# Altium PCB tm4c123_dev_board.PcbDoc
Units mil, origin at the board's own origin, x right, y up, seen from the top; angles counter-clockwise.
Board outline 6000 x 4000 mil, 2 copper layers (Top Layer, Bottom Layer); 27 components, 57 nets, 189 pads, 38 vias.
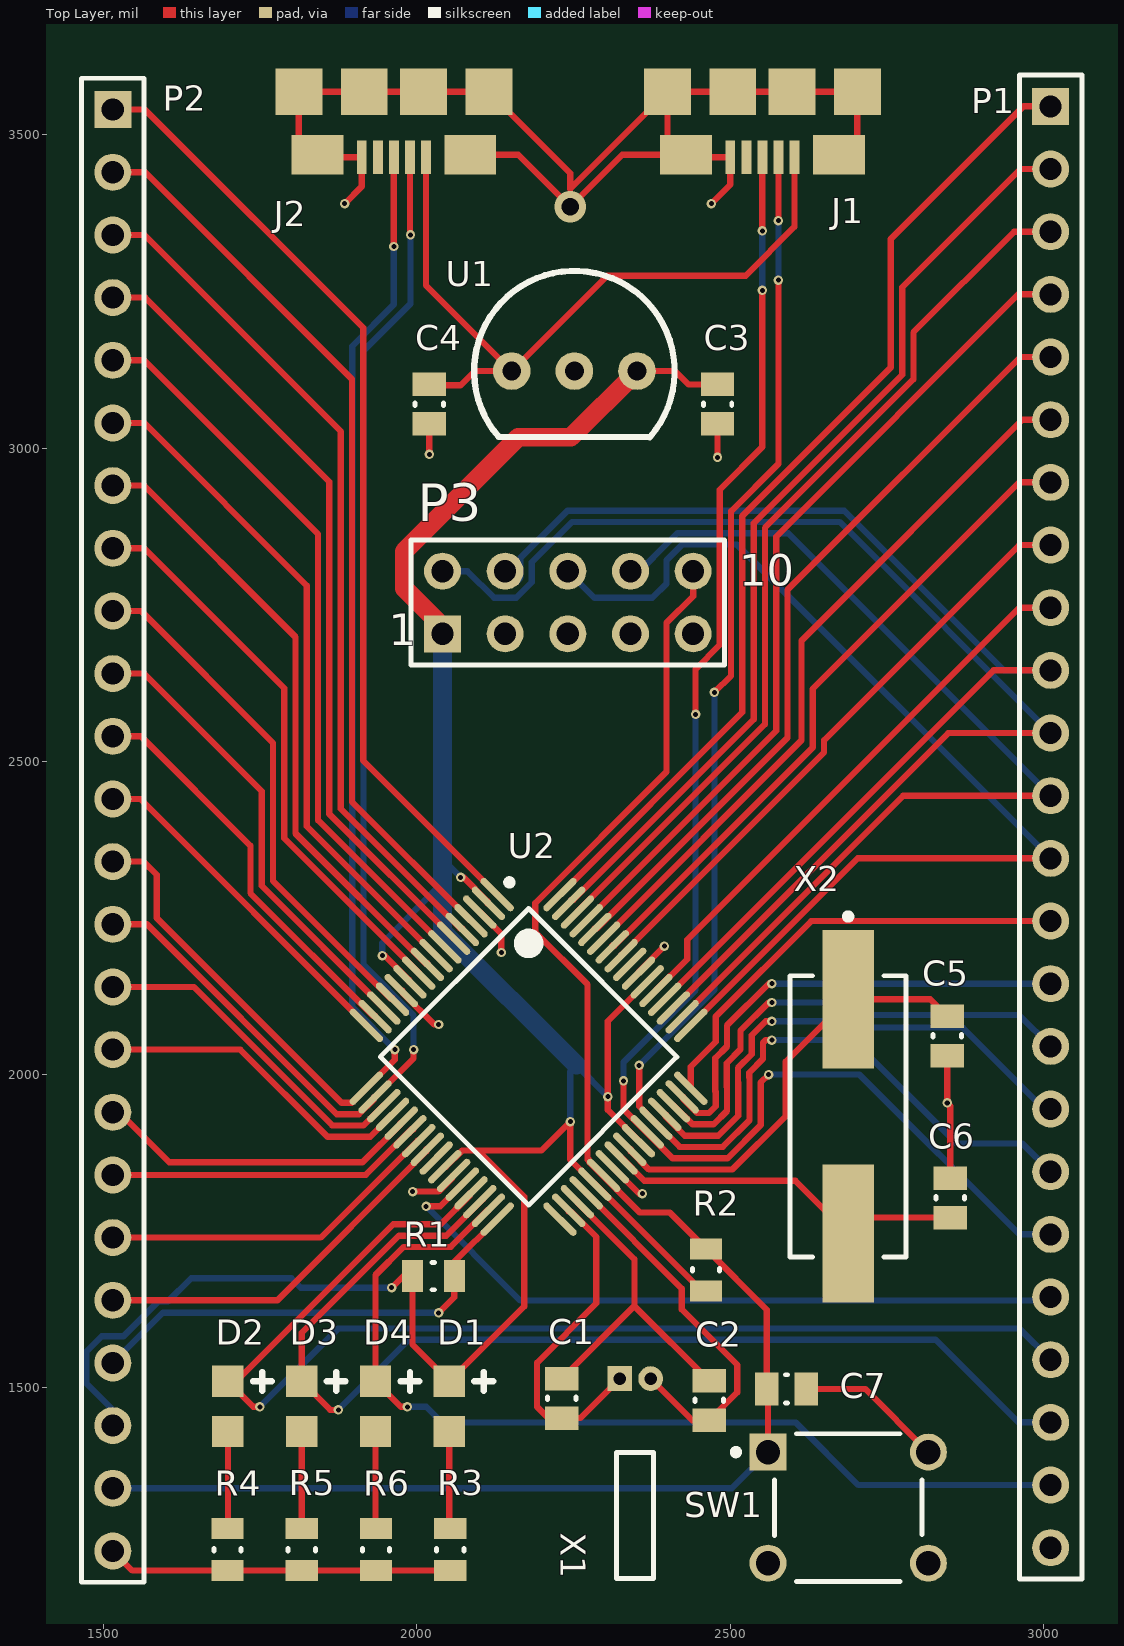
[diagram p0: Top Layer view]
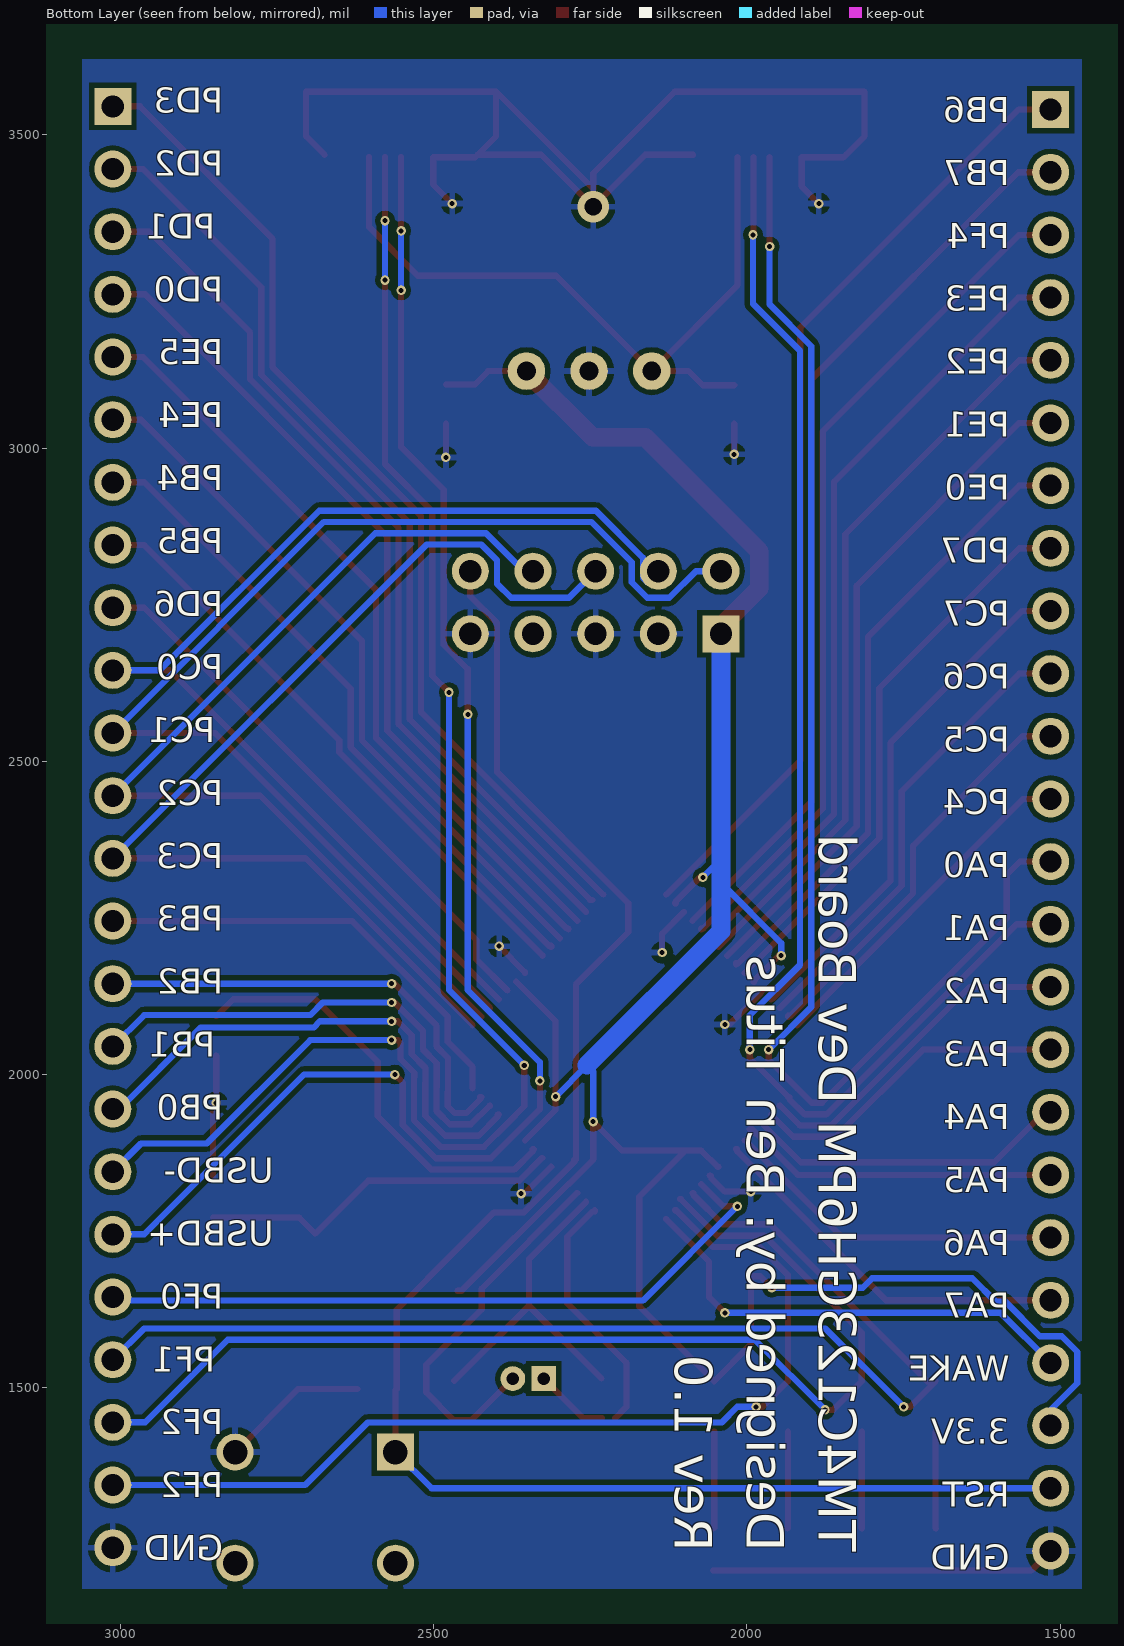
[diagram p1: Bottom Layer view, seen from below]

## Layer stack, top to bottom
Top Solder: solder mask 0.4, Solder Resist, Dk 3.5
Top Layer: signal copper 1.4
Dielectric 1: dielectric 12.6, FR-4, Dk 4.8
Bottom Layer: signal copper 1.4
Bottom Solder: solder mask 0.4, Solder Resist, Dk 3.5

## Board outline
1000,1000 7000,1000 7000,5000 1000,5000

## Design rules (kind name [scope] priority, off if disabled: settings)
Clearance [All] p1: gap=8 ignorepadtopadclearanceinfootprint=FALSE
PolygonConnect [All] p1: connectstyle=Relief reliefconductorwidth=10 reliefentries=4 polygonreliefangle="90 Angle" airgapwidth=10
RoutingVias [All] p1: holewidth=28 width=50 viastyle="Through Hole" minholewidth=8 minwidth=15 maxholewidth=28 maxwidth=50
SolderMaskExpansion [All] p1: expansion=4
Width [All] p1: maxlimit=30 minlimit=10 preferedwidth=10
30 further rules are at their usual default settings.

## Components (designator, comment, footprint, x,y, rotation, side; value= is the part's Value field where it differs from the comment)
C1 "24pF" CAPC0805(2012)145_L 2231.56,1483.53 r90 top
C2 "24pF" CAPC0805(2012)145_L 2466.56,1480.14 r90 top
C3 "0.1uF" CAPC0805(2012)145_L 2480,3070 r90 top
C4 "0.1uF" CAPC0805(2012)145_L 2020,3070 r90 top
C5 "10pF" CAPC0805(2012)145_L 2846.56,2061.97 r270 top
C6 "10pF" CAPC0805(2012)145_L 2851.56,1803.46 r90 top
C7 "1nF" CAPC0805(2012)145_L 2590.06,1498.46 r180 top
D1 "SMD_LED" "0805 Diode" 2051.98,1470.63 r270 top
D2 "SMD_LED" "0805 Diode" 1698.64,1470.63 r270 top
D3 "SMD_LED" "0805 Diode" 1816.42,1470.63 r270 top
D4 "SMD_LED" "0805 Diode" 1934.2,1470.63 r270 top
J1 "10118192-0001LF" 10118192-0001LF_10118192-0001LF(Primary) 2551.56,3625.55 r180 top
J2 "10118192-0001LF" 10118192-0001LF_10118192-0001LF(Primary) 1963.49,3625.55 r180 top
P1 "Header 24" HDR1X24 3011.56,3545.14 r270 top
P2 "Header 24" HDR1X24 1515,3540 r270 top
P3 "Header 5X2" HDR2X5 2041.06,2703.46 r0 top
R1 "10k" RESC0805(2012)_L 2026.56,1678.46 r0 top
R2 "10k" RESC0805(2012)_L 2461.56,1688.61 r270 top
R3 "1k" RESC0805(2012)_L 2053.49,1242.17 r90 top
R4 "1k" RESC0805(2012)_L 1697.98,1242.17 r90 top
R5 "1k" RESC0805(2012)_L 1816.49,1242.17 r90 top
R6 "1k" RESC0805(2012)_L 1934.99,1242.17 r90 top
SW1 "1825910-6" TECO-1825910-6_V 2688.49,1309.09 r0 top
U1 "LP2950-33LPRE3" LP3 2251.56,3122.72 r0 top value=Value
U2 "TM4C123GH6PMT7R" PM0064A_N 2178.49,2028.46 r315 top value=Value
X1 "AB15T-32.768KHZ" ABRA-AB15T-2_V 2348.49,1515.02 r90 top
X2 "ABLS2-4.096MHZ-D4Y-T" ABRA-ABLS2-2_V 2688.49,1933.46 r270 top

## Footprints (in the part's own frame and the unit in brackets; to place one, negate y for a bottom-side part, rotate by r counter-clockwise, add the part's x,y. Pads: shape width x height; smd on the part's side, far side on the other; paste and mask are expansions set on the pad)
"0805 Diode" [mil]
  rect 50x50 smd: 1(-40,0) 2(40,0)
  silkscreen extent -55,40 -25,70
10118192-0001LF_10118192-0001LF(Primary) [mm]
  rect 0.4x1.35 smd: 1(-1.3,4.1) 2(-0.65,4.1) 3(0,4.1) 4(0.65,4.1) 5(1.3,4.1)
  rect 1.9x1.9 smd: M1(-1.2,1.45) M2(1.2,1.45) S1(-3.85,1.45) S2(3.85,1.45)
  rect 2.1x1.6 smd: S3(-3.1,4) S4(3.1,4)
ABRA-AB15T-2_V [mm] "THD, 2-Leads, Body 5.1x1.5mm, Height 1.5mm"
  rect 1x1 hole 0.5: 1(0,0.627)
  round 1 hole 0.5: 2(0,-0.627)
  silkscreen extent -8.1,-0.75 -3,0.75, body extent -8.1,-0.74 0.1,0.77, height 1.5
ABRA-ABLS2-2_V [mm] "SMD, 2-Leads, Body 11.4x4.7mm, Height 3.3mm"
  rect 5.6x2.1 smd: 1(-4.75,0) 2(4.75,0)
  silkscreen extent -8.22,-2.35 5.7,2.35, body extent -5.7,-2.35 5.7,2.35, height 3.3
CAPC0805(2012)145_L [mm]
  rect 0.95x1.35 smd: 1(-0.8,0) 2(0.8,0)
  silkscreen extent -0.05,-0.58 0.05,0.58, body extent -1.1,-0.72 1.1,0.72, height 1.45
HDR1X24 [mm] "Connector; Header; 24 Position"
  rect 1.5x1.5 hole 0.9: 1(0,0)
  round 1.5 hole 0.9: 2(2.54,0) 3(5.08,0) 4(7.62,0) 5(10.16,0) 6(12.7,0) 7(15.24,0) 8(17.78,0) 9(20.32,0) 10(22.86,0) 11(25.4,0) 12(27.94,0) 13(30.48,0) 14(33.02,0) 15(35.56,0) 16(38.1,0) 17(40.64,0) 18(43.18,0) 19(45.72,0) 20(48.26,0) 21(50.8,0) 22(53.34,0) 23(55.88,0) 24(58.42,0)
  silkscreen extent -1.27,-1.27 59.69,1.27
HDR2X5 [mm] "Connector; Header; 5x2 Position"
  rect 1.5x1.5 hole 0.9: 1(0,0)
  round 1.5 hole 0.9: 2(0,2.54) 3(2.54,0) 4(2.54,2.54) 5(5.08,0) 6(5.08,2.54) 7(7.62,0) 8(7.62,2.54) 9(10.16,0) 10(10.16,2.54)
  silkscreen extent -1.27,-1.27 11.43,3.81
LP3 [mil]
  round 60 hole 30: 1(100,0) 2(0,0) 3(-100,0)
  silkscreen extent -160,-105 160,160
PM0064A_N [mm]
  oval 1.8x0.279 smd paste-0.102 mask+0.051: 1(-5.55,3.75) 2(-5.55,3.25) 3(-5.55,2.75) 4(-5.55,2.25) 5(-5.55,1.75) 6(-5.55,1.25) 7(-5.55,0.75) 8(-5.55,0.25) 9(-5.55,-0.25) 10(-5.55,-0.75) 11(-5.55,-1.25) 12(-5.55,-1.75) 13(-5.55,-2.25) 14(-5.55,-2.75) 15(-5.55,-3.25) 16(-5.55,-3.75) 33(5.55,-3.75) 34(5.55,-3.25) 35(5.55,-2.75) 36(5.55,-2.25) 37(5.55,-1.75) 38(5.55,-1.25) 39(5.55,-0.75) 40(5.55,-0.25) 41(5.55,0.25) 42(5.55,0.75) 43(5.55,1.25) 44(5.55,1.75) 45(5.55,2.25) 46(5.55,2.75) 47(5.55,3.25) 48(5.55,3.75)
  oval 0.279x1.8 smd paste-0.102 mask+0.051: 17(-3.75,-5.55) 18(-3.25,-5.55) 19(-2.75,-5.55) 20(-2.25,-5.55) 21(-1.75,-5.55) 22(-1.25,-5.55) 23(-0.75,-5.55) 24(-0.25,-5.55) 25(0.25,-5.55) 26(0.75,-5.55) 27(1.25,-5.55) 28(1.75,-5.55) 29(2.25,-5.55) 30(2.75,-5.55) 31(3.25,-5.55) 32(3.75,-5.55) 49(3.75,5.55) 50(3.25,5.55) 51(2.75,5.55) 52(2.25,5.55) 53(1.75,5.55) 54(1.25,5.55) 55(0.75,5.55) 56(0.25,5.55) 57(-0.25,5.55) 58(-0.75,5.55) 59(-1.25,5.55) 60(-1.75,5.55) 61(-2.25,5.55) 62(-2.75,5.55) 63(-3.25,5.55) 64(-3.75,5.55)
  silkscreen extent -5.67,-4.25 4.25,4.57, body extent 0,0 0.25,0.25, height 0.25
RESC0805(2012)_L [mm]
  rect 0.85x1.3 smd: 1(-0.85,0) 2(0.85,0)
  silkscreen extent -0.05,-0.55 0.05,0.55, body extent -1.1,-0.67 1.1,0.68, height 0.7
TECO-1825910-6_V [mm] "Switch, 4-Leads, Body 5.99x5.99mm"
  rect 1.5x1.5 hole 0.99: 1(-3.25,2.25)
  round 1.5 hole 0.99: 2(3.25,2.25) 3(-3.25,-2.25) 4(3.25,-2.25)
  silkscreen extent -4.67,-2.99 2.99,3, body extent -3,-2.99 2.99,3, height 5

## Part data
C1 C2 C3 C4 C5 C6 C7: library part CMP-1590-00003-1, "0805 (2012 Metric) Chip Capacitor", Case-EIA=0805, Case-Metric=2012, PackageReference=CAPC0805(2012)145
J1 J2: "CONN USB MICRO B RECPT SMT R/A", Package=None, Availability=Good, MF=Amphenol, MP=10118192-0001LF, Price="0.22 USD"
P1 P2: "Header, 24-Pin", LatestRevisionDate=17-Jul-2002, LatestRevisionNote="Re-released for DXP Platform.", Publisher="Altium Limited"
P3: "Header, 5-Pin, Dual row", LatestRevisionDate=17-Jul-2002, LatestRevisionNote="Re-released for DXP Platform.", Publisher="Altium Limited"
R1 R2 R3 R4 R5 R6: library part CMP-1591-00002-1, "0805 (2012 Metric) Chip Resistor", Case-EIA=0805, Case-Metric=2012, PackageReference=RESC0805(2012)
SW1: library part CMP-1684-00021-1, "Tact Switch, SPST-NO, 0.05 A, -35 to 85 degC, 4-Pin THD, RoHS, Bulk", Actuator Color=Black, Contact Rating @ Voltage=0.05A@24VDC, Dielectric Strength=500VAC, Manufacturer="TE Connectivity", Maximum AC Voltage Rating=N/A, Maximum Contact Resistance=100mOhm, Maximum DC Voltage Rating=24V, Minimum Insulation Resistance=100MOhm, Operating Temperature=-35to85C, Package Description="4-Pin Through Hole Device, Body 5.99 x 5.99 mm, Pitch 6.5 mm", Package Reference=THD, Actuator Length=1.4mm, Actuator Material=PolybutyleneTerephthalate, Actuator Style=RoundButton, Base Material=N/A, Body Orientation=Straight, Bushing Type=Unthreaded, Contact Material=CopperAlloy, Contact Plating=Silver, Datasheet URL=http://www.te.com/commerce/DocumentDelivery/DDEController?Action=showdoc&DocId=Customer+Drawing%7F1825910%7FC9%7Fpdf%7FEnglish%7FENG_CD_1825910_C9.pdf%7F1825910-6, Datasheet Version="Rev. C9", Dimension=5.99x5mm, Electrical Life=100000Cycles, Family=1825910, Function=MomentaryContact, Housing Material=N/A, Illumination=N/R, Manufacturer URL=http://www.te.com, Mechanical Life=100000Cycles, Mounting=ThroughHole, Packaging=N/A, Part No=1825910-6, Pole Throw Configuration=SPST, Product Weight=N/A, RoHS=Yes, Seal Description=N/A, Seal Location=N/A, Switch Configuration=OFF(ON), Terminal Type=PCPins, Thread Size=N/R
U1: "Imported", Manufacturer="Texas Instruments", Built_By=EMA_UL_Team, C="Copyright (C) 2015 Accelerated Designs. All rights reserved", Manufacturer_Part_Number=LP2950-33LPRE3, RefDes=RefDes, TYPE=Type, Vendor="Texas Instruments"
U2: "Imported", Alternate_PartNumber=TM4C123GH6PMT, Manufacturer="Texas Instruments", PartNumber=TM4C123GH6PMTR, CompType=IC, MountType=SMT, PackageReference=PM0064A, PIN_COUNT=64, RefDes=RefDes, RoHS=Y, TYPE=TYPE
X1: library part CMP-1326-00001-1, "Low Frequency Cylindrical Watch Crystal, 32.768 kHz, -20 to 70 degC, 2-Pin 5 x 1.4 x 1.5 mm THD, RoHS, Bulk", Frequency="32.768 kHz", Load Capacitance CL="12.5 pF", Manufacturer=Abracon, Shunt Capacitance C0="1 pF Typ.", Temperature Range="-20 to 70 degC", ComponentLink1Description="Manufacturer URL", ComponentLink1URL=http://www.abracon.com/, ComponentLink2Description=Datasheet, ComponentLink2URL=http://www.abracon.com/Resonators/AB15T.pdf, ComponentLink3Description="Package Specification", ComponentLink3URL=http://www.abracon.com/Resonators/AB15T.pdf, DatasheetVersion=Jun-10, ESR="40 KOhm Max.", Mounting Technology="Through Hole", PackageDescription="2-Pin THD, Body 5 x 1.4 mm, Pin Spacing 0.45 mm", Packing=Bulk, PartNumber=AB15T-32.768KHZ, RoHS=TRUE
X2: library part CMP-0277-00002-1, "Low Profile Surface Mount Microprocessor Crystal, 4.096 MHz +/-30 ppm, 180 Ohm, -40 to 85 degC, 2-Pin 11.4 x 4.7 x 3.3 mm SMD, RoHS, Tape and Reel", Freq. Stability="+/- 30 ppm", Frequency="4.096 MHz", Load Capacitance="18 pF", Manufacturer=Abracon, Operating Temp. Range="-40 to 85 degC", Shunt Capacitance="7 pF Max.", ComponentLink1Description="Manufacturer URL", ComponentLink1URL=http://www.abracon.com/, ComponentLink2Description=Datasheet, ComponentLink2URL=http://www.abracon.com/Resonators/ABLS2.pdf, DatasheetVersion="Rev. 03.31.11", ESR="180 Ohm", Freq. Tolerance="+/- 30 ppm", Mounting Technology="Surface Mount", Operation Mode="Fundamental or 3rd Overtone", PackageDescription="2-Pin SMD, Body 11.4 x 4.7 mm, Height 3.3 mm", PackageReference=ABLS2-2, Packing="Tape and Reel", PartNumber=ABLS2-4.096MHZ-D4Y-T, RoHS=TRUE

## Via types
v1: diameter 15, hole 8, Top Layer to Bottom Layer, 37 vias
v2: diameter 50, hole 28, Top Layer to Bottom Layer, 1 vias

## Nets (pads, with @x,y where several pads share a name; then routed paths per layer and width w, separated by ;. In a path a pad name is that pad's centre, name@x,y a point inside that pad or via, vN(x,y) a via of type N, cw(c..) or ccw(c..) an arc to the next point about the centre after c; other vN are vias at no path point)
+5: C4.2 J1.1 J2.1 U1.3 | length 1197
  Top Layer w10: J2.1 2014.67,3259.61 U1.3 ; C4.2@2020,3099.96 2069.96,3099.96 2092.72,3122.72 U1.3 ; J1.1 2602.74,3352.74 2525,3275 2303.84,3275 U1.3
GND: C3.1 C4.1 C5.2 C6.2 C7.1 J1.5 J1.M1 J1.M2 J1.S1 J1.S2 J1.S3 J1.S4 J2.5 J2.M1 J2.M2 J2.S1 J2.S2 J2.S3 J2.S4 P1.24 P2.24 P3.3 P3.5 P3.9 R3.1 R4.1 R5.1 R6.1 SW1.2 U1.2 U2.3 U2.12 U2.27 U2.39 U2.55 | length 3555.9
  Top Layer w10: P2.24 1546.3,1208.7 R4.1 R5.1 R6.1 R3.1 ; v1(1885,3390) 1912.31,3417.31 J2.5 1845.38,3464.13 J2.S4 1811.91,3497.6 J2.S2 J2.M2 J2.M1 J2.S1 2245,3438.53 2245,3413.48 J1.S2 ; U2.12 1976.94,2134.25 1976.94,2131.87 1979.35,2129.46 1979.35,2128.5 2027.84,2080 v1(2035,2080) ; v1(1993.41,1813.41) 2034.71,1813.41 2057.11,1835.81 2057.11,1838.19 2058.07,1839.16 U2.27 ; v1(2020,2990) C4.1 ; J2.S3 2161.93,3468.07 v2(2245,3385) 2328.07,3468.07 J1.S4 ; U2.3 2135,2225.07 v1(2135,2195) ; U2.39 2355.19,1810 v1(2360,1810) ; U2.55 2353.87,2163.77 2395,2204.89 v1(2395,2205) ; v1(2470,3390) 2500.38,3420.38 J1.5 2433.45,3464.13 J1.S4 ; v1(2480,2985) C3.1 ; C7.1 2715.65,1498.46 SW1.2 ; J1.S3 2703.13,3497.6 J1.S1 J1.M1 J1.M2 J1.S2 ; C5.2 v1(2846.56,1955.14) 2851.56,1950.14 C6.2 ; J1.S2 2399.98,3497.6 J1.S4
GNDX: C1.2 C2.2 U2.35 | length 536.6
  Top Layer w10: C1.2 2347.37,1630.83 ; U2.35 2256.44,1796.69 2347.37,1705.77 2347.37,1630.83 ; C2.2 2347.37,1630.83
NetC1_1: C1.1 U2.34 X1.1 | length 517.2
  Top Layer w10: C1.1@2209.67,1452.03 2191.98,1469.72 2191.98,1540.57 2286.56,1635.14 2286.56,1741.12 2245.87,1781.81 2242.52,1781.81 U2.34 ; C1.1@2230.89,1452.03 C1.1 2260.81,1452.03 X1.1
NetC2_1: C2.1 U2.36 X1.2 | length 602.5
  Top Layer w10: U2.36 2422.97,1658.71 2422.97,1625.41 2511.56,1536.82 2511.56,1492.98 2467.23,1448.65 C2.1 2439.55,1448.65 X1.2
NetC5_1: C5.1 U2.41 X2.1 | length 696.5
  Top Layer w10: U2.41 2341.63,1880.92 2341.63,1877.57 2370.51,1848.69 2503.5,1848.69 2588.56,1933.75 2588.56,2020.54 X2.1 2819.55,2120.47 C5.1
NetC6_1: C6.1 U2.40 X2.2 | length 586
  Top Layer w10: U2.40 2326.74,1867 2363.05,1830.69 2604.26,1830.69 X2.2 2714,1771.97 C6.1
NetD1_2: D1.2 R3.2 | length 155.6
  Top Layer w10: D1.2 2051.98,1277.14 R3.2
NetD2_2: D2.2 R4.2 | length 155.3
  Top Layer w10: R4.2 1698.64,1276.29 D2.2
NetD3_2: D3.2 R5.2 | length 155
  Top Layer w10: D3.2 1816.42,1275.69 R5.2
NetD4_2: D4.2 R6.2 | length 155.3
  Top Layer w10: D4.2 1934.2,1276.42 R6.2
PA0: J2.3 P2.13 U2.17 | length 2174.4
  Top Layer w10: P2.13 1564,2340 1585,2319 1585,2250 1880,1955 1896.23,1955 U2.17 1965,2023.77 v1(1965,2040) ; v1(1963.49,3321.51) J2.3
  Bottom Layer w10: v1(1963.49,3321.51) 1963.49,3228.94 1897,3162.46 1897,2108 v1(1965,2040)
PA1: J2.2 P2.14 U2.18 | length 2147.1
  Top Layer w10: P2.14 1569.54,2240 1872.54,1937 1907.75,1937 1931.83,1961.08 1931.83,1964.44 U2.18 1995,2025.93 v1(1995,2040) ; J2.2 1989.08,3340.92 v1(1990,3340)
  Bottom Layer w10: v1(1990,3340) 1990,3230 1915,3155 1915,2175 1995,2095 v1(1995,2040)
PA2: P2.15 U2.19 | length 537.3
  Top Layer w10: P2.15 1644.09,2140 1865.09,1919 1915.2,1919 1947.07,1950.87 U2.19
PA3: P2.16 U2.20 | length 518.7
  Top Layer w10: P2.16 1718.63,2040 1857.63,1901 1925.75,1901 U2.20
PA4: P2.17 U2.21 | length 520.6
  Top Layer w10: P2.17 1525.28,1940 1605.14,1860.14 1913.44,1860.14 1973.59,1920.29 1973.59,1922.68 U2.21
PA5: P2.18 U2.22 | length 523.3
  Top Layer w10: P2.18 1918.75,1840 U2.22@1987.51,1908.76 ; U2.22 U2.22@1987.51,1908.76 ; U2.22@1994.94,1912.84 U2.22@1993.97,1912.84 ; U2.22@1987.51,1908.76 1991.59,1912.84 U2.22@1993.97,1912.84 ; U2.22@1987.51,1908.76 1987.51,1906.37 U2.22@1993.97,1912.84
PA6: P2.19 U2.23 | length 552.2
  Top Layer w10: P2.19 1846.59,1740 2001.43,1894.84 U2.23
PA7: P2.20 U2.24 | length 603.8
  Top Layer w10: P2.20 1777.78,1640 2015.35,1877.57 2015.35,1880.92 U2.24
PB0: P1.17 U2.45 | length 828.3
  Top Layer w10: U2.45 2397.31,1936.6 2397.31,1933.24 2427.86,1902.69 2481.13,1902.69 2513.06,1934.61 2513.06,1987.66 2512.56,1988.15 2512.56,2010.69 2534.56,2032.69 2534.56,2062.69 2557.01,2085.14 v1(2566.56,2085.14)
  Bottom Layer w10: v1(2566.56,2085.14) 2681.1,2085.14 2691.1,2075.14 2871.56,2075.14 3001.56,1945.14 P1.17
PB1: P1.16 U2.46 | length 786.7
  Top Layer w10: U2.46 2410.26,1950.52 2440.08,1920.69 2473.67,1920.69 2495.06,1942.07 2495.06,1980.2 2494.56,1980.7 2494.56,2018.14 2516.56,2040.14 2516.56,2070.14 2561.56,2115.14 v1(2566.56,2115.14)
  Bottom Layer w10: v1(2566.56,2115.14) 2676.56,2115.14 2696.56,2095.14 2961.56,2095.14 P1.16
PB2: P1.15 U2.47 | length 751.7
  Top Layer w10: U2.47 2425.15,1964.44 2425.15,1961.08 2447.54,1938.69 2466.22,1938.69 2477.06,1949.53 2477.06,1972.74 2476.56,1973.24 2476.56,2026.46 2495.06,2044.96 2495.06,2078.64 2561.56,2145.14 v1(2566.56,2145.14)
  Bottom Layer w10: v1(2566.56,2145.14) P1.15
PB3: P1.14 U2.48 | length 728.5
  Top Layer w10: U2.48 2437.39,2012.75 2477.06,2052.41 2477.06,2092.78 2629.41,2245.14 P1.14
PB4: P1.7 U2.58 | length 1062.3
  Top Layer w10: U2.58 2312.11,2205.53 2315.47,2205.53 2632,2522.06 2632,2615.58 2961.56,2945.14 P1.7
PB5: P1.8 U2.57 | length 968.5
  Top Layer w10: U2.57 2326.03,2190.64 2650,2514.6 2650,2533.58 2961.56,2845.14 P1.8
PB6: P2.1 U2.1 | length 1536.8
  Top Layer w10: P2.1 1566.42,3540 1914.56,3191.86 1914.56,2501.19 U2.1
PB7: P2.2 U2.4 | length 1461.5
  Top Layer w10: P2.2 1566.7,3440 1896.56,3110.14 1896.56,2435.67 U2.4
PC0: P1.10 P3.4 U2.52 | length 1882.3
  Top Layer w10: U2.52 2920.44,2645.14 P1.10
  Bottom Layer w10: P3.4 2158.41,2786.12 2165.59,2793.3 2165.59,2825.06 2240.53,2899.99 2682.16,2899.99 2937.01,2645.14 P1.10
PC1: P1.11 P3.2 U2.51 | length 1980.1
  Top Layer w10: U2.51 2848.28,2545.14 P1.11
  Bottom Layer w10: P3.2 2080.92,2803.46 2123.45,2760.94 2158.68,2760.94 2183.59,2785.85 2183.59,2817.6 2247.98,2881.99 2674.71,2881.99 P1.11
PC2: P1.12 P3.8 U2.50 | length 1623.6
  Top Layer w10: U2.50 2776.12,2445.14 P1.12
  Bottom Layer w10: P3.8 2341.06,2789.06 2415.99,2863.99 2592.71,2863.99 P1.12
PC3: P1.13 P3.6 U2.49 | length 1737.4
  Top Layer w10: U2.49 2703.96,2345.14 P1.13
  Bottom Layer w10: P3.6 2283.59,2760.94 2375.94,2760.94 2398.54,2783.54 2398.54,2821.08 2423.45,2845.99 2510.71,2845.99 P1.13
PC4: P2.12 U2.16 | length 554.7
  Top Layer w10: P2.12 1558.87,2440 1919.59,2079.28 U2.16
PC5: P2.11 U2.15 | length 649.2
  Top Layer w10: P2.11 1560,2540 1734.56,2365.44 1734.56,2289.77 1930.15,2094.17 1933.51,2094.17 U2.15
PC6: P2.10 U2.14 | length 742
  Top Layer w10: P2.10 1565,2640 1752.56,2452.44 1752.56,2301.28 U2.14
PC7: P2.9 U2.13 | length 832.9
  Top Layer w10: P2.9 1560,2740 1770.56,2529.44 1770.56,2309.44 1957.99,2122.01 1961.35,2122.01 U2.13
PD0: P1.4 U2.61 | length 1336.7
  Top Layer w10: U2.61 2573.59,2548.84 2573.59,2858.59 2960.14,3245.14 P1.4
PD1: P1.3 U2.62 | length 1432.6
  Top Layer w10: U2.62 2256.44,2260.23 2555.59,2559.39 2555.59,2872.5 2792.56,3109.46 2792.56,3184.46 2953.24,3345.14 P1.3
PD2: P1.2 U2.63 | length 1513.6
  Top Layer w10: U2.63@2246.21,2278.81 2249.56,2278.81 2537.59,2566.84 2537.59,2879.95 2774.56,3116.92 2774.56,3256.46 2963.24,3445.14 P1.2
PD3: P1.1 U2.64 | length 1607.5
  Top Layer w10: U2.64 2519.59,2578.36 2519.59,2891.5 2756.56,3128.46 2756.56,3333.46 2968.24,3545.14 P1.1
PD6: P1.9 U2.53 | length 901.1
  Top Layer w10: U2.53 2431.56,2184.1 2431.56,2215.14 2961.56,2745.14 P1.9
PD7: P2.8 U2.10 | length 909.4
  Top Layer w10: P2.8 1565,2840 1788.56,2616.44 1788.56,2377.34 2003.1,2162.8 U2.10
PE0: P2.7 U2.9 | length 1003.2
  Top Layer w10: P2.7 1565,2940 1806.56,2698.44 1806.56,2384.8 2013.67,2177.69 2017.02,2177.69 U2.9
PE1: P2.6 U2.8 | length 1093.1
  Top Layer w10: P2.6 1565,3040 1824.56,2780.44 1824.56,2396.31 U2.8
PE2: P2.5 U2.7 | length 1184.9
  Top Layer w10: P2.5 1565,3140 1842.56,2862.44 1842.56,2406.15 U2.7
PE3: P2.4 U2.6 | length 1277.8
  Top Layer w10: P2.4 1566.7,3240 1860.56,2946.14 1860.56,2415.99 U2.6
PE4: P1.6 U2.59 | length 1149.2
  Top Layer w10: U2.59 2614,2533.57 2614,2692.58 2966.56,3045.14 P1.6
PE5: P1.5 U2.60 | length 1245
  Top Layer w10: U2.60 2284.28,2233.36 2287.63,2233.36 2591.59,2537.33 2591.59,2773.5 2963.24,3145.14 P1.5
PF0: P1.20 U2.28 | length 1133.5
  Top Layer w10: v1(2015,1790) 2037.46,1790 U2.28
  Bottom Layer w10: v1(2015,1790) 2165.5,1639.5 3005.92,1639.5 P1.20
PF1: D2.1 P1.21 U2.29 | length 1916.7
  Top Layer w10: v1(1749.64,1470) 1739.27,1470 D2.1 1712.05,1510.63 1962.56,1761.14 2038.12,1761.14 2084.94,1807.97 2084.94,1811.32 U2.29
  Bottom Layer w10: v1(1749.64,1470) 1874.64,1595 2961.7,1595 P1.21
PF2: D3.1 P1.22 U2.30 | length 1770.7
  Top Layer w10: v1(1875,1465) 1862.05,1465 D3.1 1816.42,1587.95 1971.61,1743.14 2046.99,1743.14 2105.33,1801.48 U2.30@2106.3,1801.48
  Bottom Layer w10: v1(1875,1465) 1987,1577 2828,1577 2959.86,1445.14 P1.22
PF3: D4.1 P1.23 U2.31 | length 1538.6
  Top Layer w10: v1(1984.91,1470) 1974.83,1470 D4.1 1934.2,1680.28 1979.06,1725.14 2054.44,1725.14 2112.78,1783.48 U2.31
  Bottom Layer w10: v1(1984.91,1470) 2015,1470 2040,1445 2605,1445 2704.86,1345.14 P1.23
PF4: P2.3 U2.5 | length 1370.6
  Top Layer w10: P2.3 1565,3340 1878.56,3026.44 1878.56,2424.15 2069.35,2233.36 2072.7,2233.36 U2.5
RST: C7.2 P2.23 P3.10 R2.1 SW1.1 U2.38 | length 2762.8
  Top Layer w10: P3.10 2441.06,2763.61 2398.54,2721.08 2398.54,2483.47 2188.93,2273.86 2188.93,2227.47 2272.45,2143.95 2272.45,1866.58 2273,1866.03 2273,1864.03 2275,1864.03 2275,1860.68 2355.68,1780 2403.63,1780 R2.1 2558.57,1625.06 C7.2 2560.54,1496.5 SW1.1
  Bottom Layer w10: P2.23 2502.86,1340 SW1.1
USB1D+: J1.3 P1.19 U2.43 | length 2525.7
  Top Layer w10: v1(2330,1990) 2330,1944.87 2408.19,1866.69 2496.04,1866.69 2549.06,1919.7 2549.06,1987.64 v1(2561.56,2000.14) ; v1(2445,2575) 2445,2647.26 2483.59,2685.85 2483.59,2933.59 2551.56,3001.56 v1(2551.56,3251.56) ; v1(2551.56,3346.56) J1.3
  Bottom Layer w10: v1(2330,1990) 2330,2020 2445,2135 v1(2445,2575) ; v1(2551.56,3251.56) v1(2551.56,3346.56) ; v1(2561.56,2000.14) 2706.56,2000.14 2961.56,1745.14 P1.19
USB1D-: J1.2 P1.18 U2.44 | length 2508.2
  Top Layer w10: v1(2355,2015) 2355,1949.39 U2.44 2419.7,1884.69 2488.59,1884.69 2531.06,1927.16 2531.06,1995.11 2530.56,1995.61 2530.56,2003.23 2552.56,2025.23 2552.56,2051.14 2556.56,2055.14 v1(2566.56,2055.14) ; v1(2475,2610) 2501.59,2636.59 2501.59,2898.95 2577.15,2974.51 v1(2577.15,3267.85) ; v1(2577.15,3362.85) J1.2
  Bottom Layer w10: v1(2355,2015) 2475,2135 v1(2475,2610) ; v1(2566.56,2055.14) 2696.56,2055.14 2861.56,1890.14 2966.56,1890.14 P1.18 ; v1(2577.15,3267.85) v1(2577.15,3362.85)
VCC: C3.2 D1.1 P2.22 P3.1 R1.1 R2.2 U1.1 U2.2 U2.11 U2.26 U2.37 U2.42 U2.54 | length 4318.4
  Top Layer w10: v1(1945,2190) 1949.03,2190 1987.51,2151.52 1987.51,2149.14 1988.48,2148.17 U2.11 ; v1(1960,1660) 1978.46,1678.46 R1.1 1993.09,1569.51 D1.1 2171.56,1630.21 2171.56,1805.14 2097.87,1878.83 ; U2.26 2046.54,1853.08 2072.28,1878.83 2097.87,1878.83 ; v1(2070,2315) 2074.58,2315 2112.78,2276.8 2112.78,2273.45 U2.2 ; U1.1 2412.28,3122.72 2433.5,3101.5 C3.2 ; U2.42 2305,1943.71 v1(2305,1965) 2305,2085.38 U2.54 ; R2.2 2455.08,1655.14 2284.98,1825.24 U2.37 2245,1864.52 v1(2245,1925) 2198.83,1878.83 2097.87,1878.83
  Top Layer w30: P3.1 2052.54,2703.46 1980,2776 1980,2835 2162,3017 2245.84,3017 U1.1
  Bottom Layer w10: P2.22 1515,1465 1472.47,1507.53 1472.47,1557.62 1497.38,1582.53 1532.07,1582.53 1587.54,1638 1603,1638 1640,1675 1800,1675 1815,1660 v1(1960,1660) ; v1(1945,2190) 1945,2210 2041.06,2306.06 ; 2041.06,2343.94 v1(2070,2315) ; v1(2245,1925) 2245,2005 2255,2015 v1(2305,1965)
  Bottom Layer w30: P3.1 2041.06,2343.94 2041.06,2306.06 2041.06,2228.94 2255,2015
WAKE: P2.21 R1.2 U2.32 | length 741.4
  Top Layer w10: v1(2035,1620) 2060.02,1645.02 R1.2 2060.02,1701.21 U2.32
  Bottom Layer w10: P2.21 1595,1620 v1(2035,1620)
pads on no net: J1.4 J2.4 P3.7 SW1.3 SW1.4 U2.25 U2.33 U2.56

## Polygon pours and split planes (outlines as drawn)
GND on Bottom Layer "GND_L02_P000" (solid, pour order 0): 1465,1180 3060,1180 3060,3620 1465,3620

## Silkscreen, mask and mechanical layers (free items; w line width, h text height)
Bottom Overlay:
  text "PD3" at 2834.97,3535 h40
  text "PB6" at 1580,3520 h40
  text "PD2" at 2834.97,3434.56 h40
  text "PB7" at 1580,3419.56 h40
  text "PD1" at 2848.3,3334.13 h40
  text "PF4" at 1580,3319.13 h40
  text "PD0" at 2834.97,3233.69 h40
  text "PE3" at 1580,3218.69 h40
  text "PE5" at 2834.97,3133.26 h40
  text "PE2" at 1580,3118.26 h40
  text "PE4" at 2834.97,3032.82 h40
  text "PE1" at 1580,3017.82 h40
  text "PB4" at 2834.97,2932.39 h40
  text "PE0" at 1580,2917.39 h40
  text "PB5" at 2834.97,2831.96 h40
  text "PD7" at 1580,2816.96 h40
  text "PD6" at 2834.97,2731.52 h40
  text "PC7" at 1580,2716.52 h40
  text "PC0" at 2834.97,2631.09 h40
  text "PC6" at 1580,2616.09 h40
  text "PC1" at 2848.3,2530.65 h40
  text "PC5" at 1580,2515.65 h40
  text "PC2" at 2834.97,2430.22 h40
  text "PC4" at 1580,2415.22 h40
  text "PC3" at 2834.97,2329.78 h40
  text "PA0" at 1580,2314.78 h40
  text "PB3" at 2834.97,2229.35 h40
  text "PA1" at 1580,2214.35 h40
  text "PB2" at 2834.97,2128.91 h40
  text "PA2" at 1580,2113.91 h40
  text "PB1" at 2848.3,2028.48 h40
  text "PA3" at 1580,2013.48 h40
  text "PB0" at 2834.97,1928.04 h40
  text "PA4" at 1580,1913.04 h40
  text "USBD-" at 2755,1827.61 h40
  text "PA5" at 1580,1812.61 h40
  text "USBD+" at 2755,1727.17 h40
  text "PA6" at 1580,1712.17 h40
  text "PF0" at 2834.97,1626.74 h40
  text "PA7" at 1580,1611.74 h40
  text "PF1" at 2848.3,1526.3 h40
  text "WAKE" at 1580,1511.3 h40
  text "PF2" at 2834.97,1425.87 h40
  text "3.3V" at 1580,1410.87 h40
  text "PF2" at 2834.97,1325.43 h40
  text "RST" at 1580,1310.43 h40
  text "TM4C123GH6PM Dev Board" at 1885,1239 h60 r90
  text "Designed by: Ben Titus" at 2000,1239 h60 r90
  text "Rev 1.0" at 2115,1239 h60 r90
  text "GND" at 2834.97,1225 h40
  text "GND" at 1580,1210 h40
Drill Drawing:
  lines w10: 1460,3614 1460,1184 1466,1178 3056,1178 3069,1191 3069,3608 3058,3619 1465,3619

## Text inside footprints (layer, text, board x,y; h text height)
P3: Top Overlay "10" at 2515,2780 h50; Top Overlay "1" at 1955,2685 h50